# EAGLE board LinuxBoard_v1.3 (EAGLE 7.2.0)
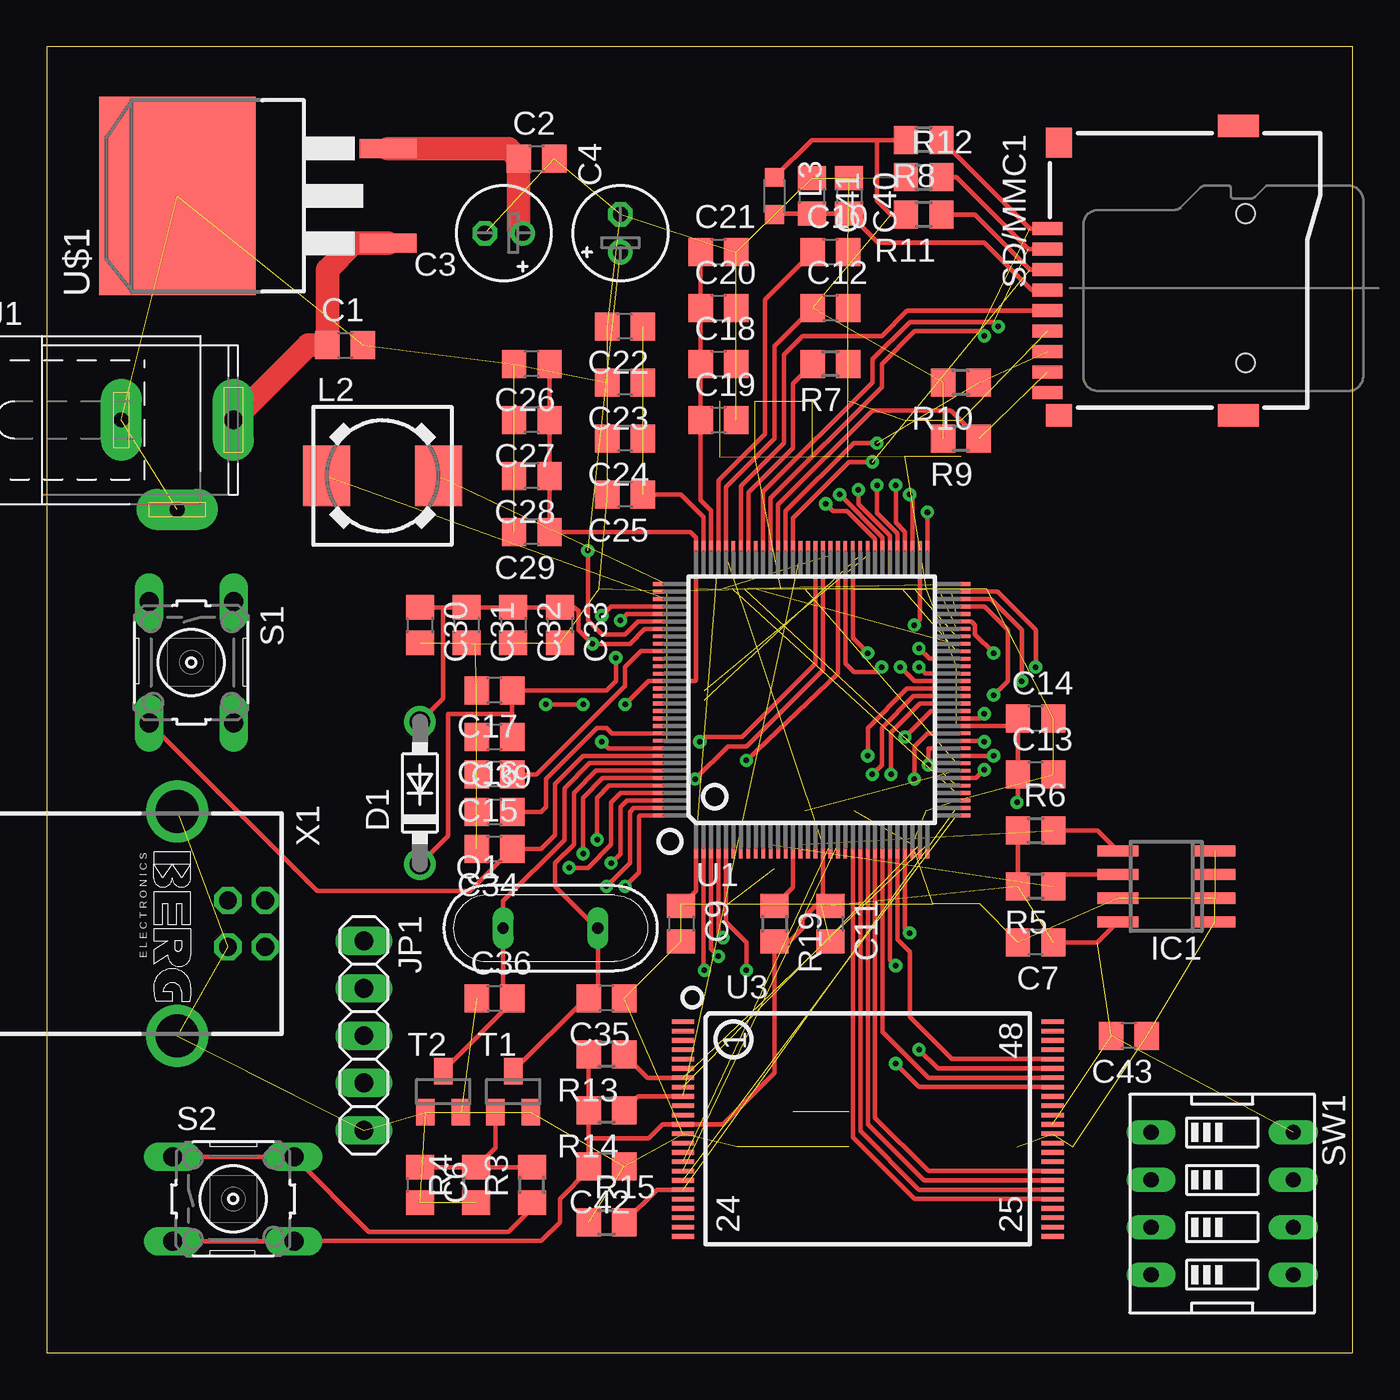
[diagram p0: board, top side]
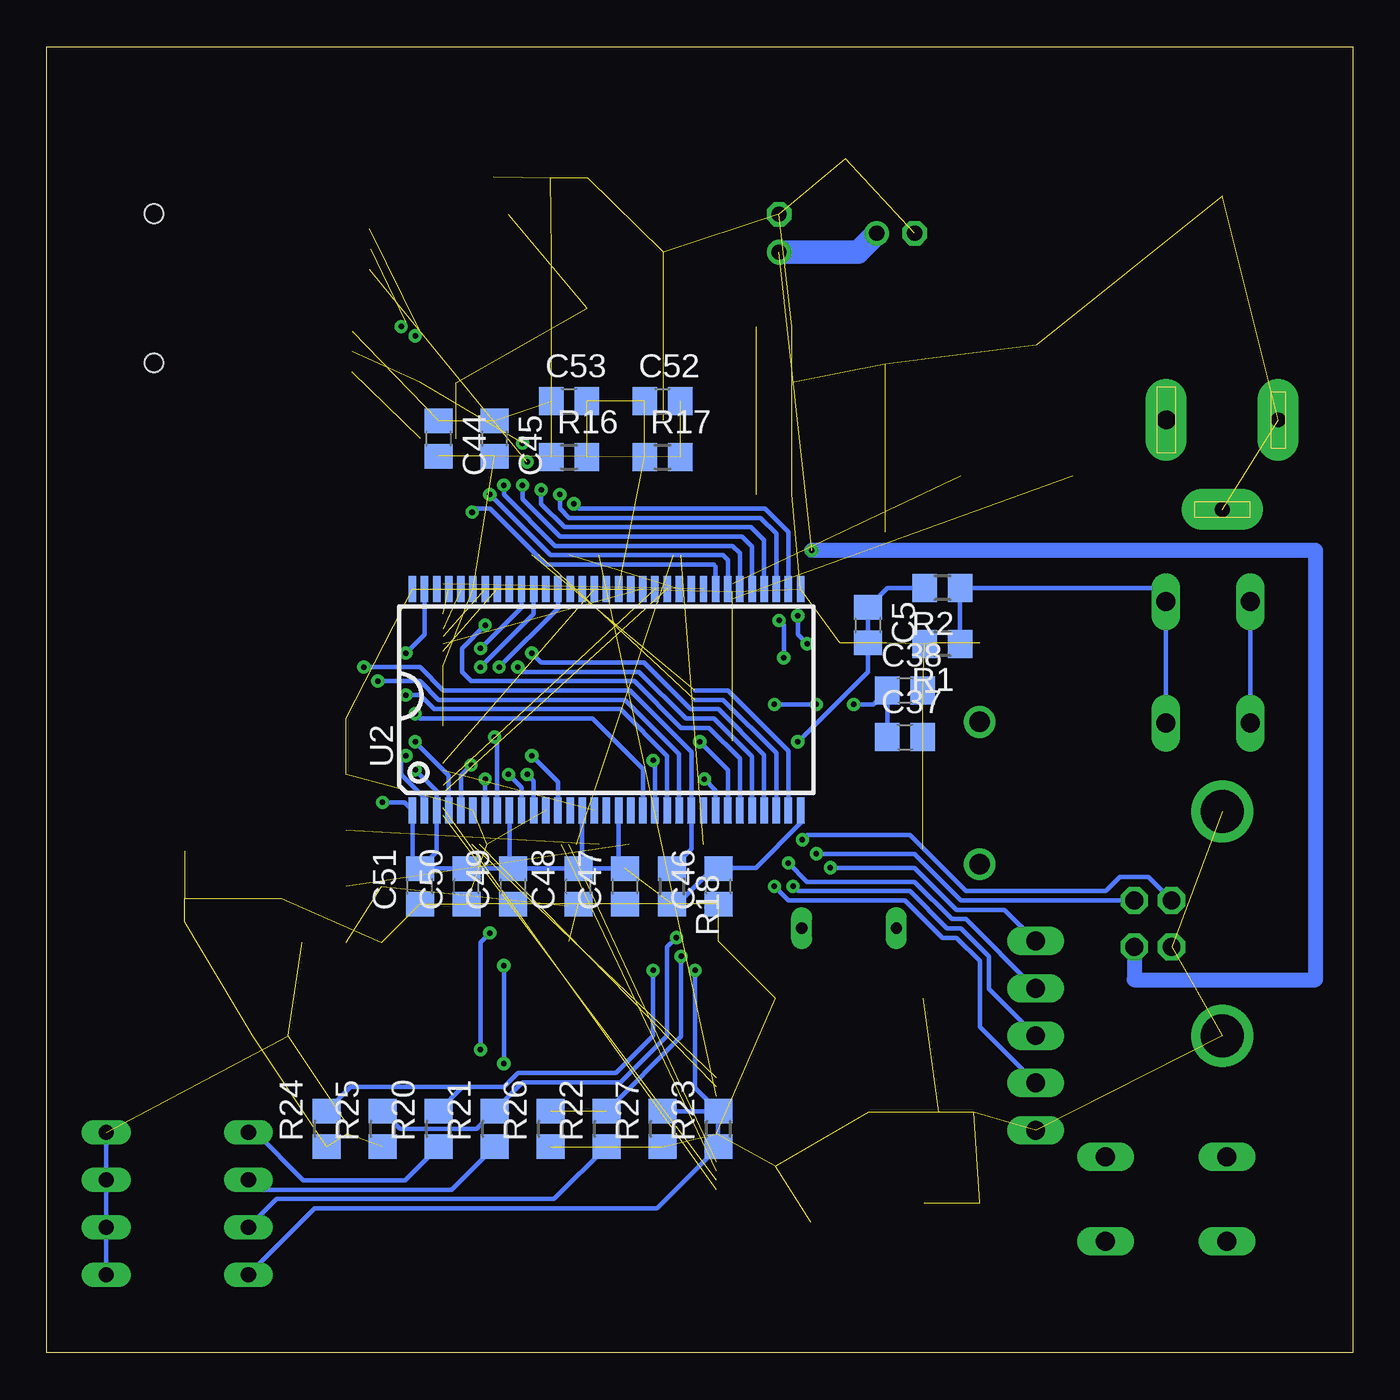
[diagram p1: board, bottom side, seen from below]

Size 70 x 70 mm. Coordinates in mm from the lower left corner, seen from the top.
Outline: 0,0 70,0 70,70 0,70 0,0
Copper layers (1*16): Top 0.035mm / dielectric 1.5mm / Bottom 0.035mm
Design rules "default": minimum track width 10mil, minimum drill 24mil, track to track 8mil, track to pad 8mil, pad to pad 8mil, via to via 8mil, smd to smd 8mil, copper to edge 40mil, drill to drill 8mil, minimum pad ring 10mil, minimum via ring 8mil, stop-mask expansion 4mil, vias tented up to drill 0mil, thermal gap 10mil
Net classes: 1 pwr: width 0.5 mm, clearance 0.2 mm

## Footprints (pad centres in the part's own frame; a part is rotated, then mirrored left to right if it is on the bottom)
C0805 = smd 1.3 x 1.5: 1 -0.95,0; 2 0.95,0
E2-5 = drill 0.813 pad 1.27: + -1.016,0 | drill 0.813 pad 1.27 octagon: - 1.016,0
DO41-7.6 = drill 1.1 pad 1.7: A 3.81,0; C -3.81,0
SO-08 = smd 0.6 x 2.2: 1 -1.905,-2.6; 2 -0.635,-2.6; 3 0.635,-2.6; 4 1.905,-2.6; 5 1.905,2.6; 6 0.635,2.6; 7 -0.635,2.6; 8 -1.905,2.6
SPC4077 = drill 0.8 pad 2.184 long: 1 -3,0; 2 0,-4.8 | drill 1 pad 2.184 long: 3 3,0
1X05 = drill 1.016 long: 1 -5.08,0; 2 -2.54,0; 3 0,0; 4 2.54,0; 5 5.08,0
DR73 = smd 2.5 x 3.25: 1 -3,0; 2 3,0
L2012C = smd 1 x 1: 1 -1,0; 2 1,0
QS = drill 0.61 long: 1 -2.54,0; 2 2.54,0
R0805 = smd 1.3 x 1.5: 1 -0.95,0; 2 0.95,0
B3F-10XX = drill 1.016 long: 1 -3.251,2.261; 2 3.251,2.261; 3 -3.251,-2.261; 4 3.251,-2.261
TFC-WPAPR-08 = smd 1.6 x 0.7: 1 -7.375,2.25; 2 -7.375,1.15; 3 -7.375,0.05; 4 -7.375,-1.05; 5 -7.375,-2.15; 6 -7.375,-3.25; 7 -7.375,-4.35; 8 -7.375,-5.45; 9 -7.375,-6.55 | smd 1.4 x 1.2: 10 -6.75,-7.75 | smd 1.4 x 1.6: 11 -6.75,6.85 | smd 2.2 x 1.2: 12 2.85,-7.75; 13 2.85,7.75 | hole 1: 3.25,-4.95; 3.25,3.05
EDG-04 = drill 0.813 long: 1 -3.81,-3.81; 2 -1.27,-3.81; 3 1.27,-3.81; 4 3.81,-3.81; 5 3.81,3.81; 6 1.27,3.81; 7 -1.27,3.81; 8 -3.81,3.81
SOT23 = smd 1 x 1.4: 1 -0.95,-1.1; 2 0.95,-1.1; 3 0,1.1
TQFP128LD = smd 0.2 x 1.5: 1 -6.2,-7.75; 2 -5.8,-7.75; 3 -5.4,-7.75; 4 -5,-7.75; 5 -4.6,-7.75; 6 -4.2,-7.75; 7 -3.8,-7.75; 8 -3.4,-7.75; 9 -3,-7.75; 10 -2.6,-7.75; 11 -2.2,-7.75; 12 -1.8,-7.75; 13 -1.4,-7.75; 14 -1,-7.75; 15 -0.6,-7.75; 16 -0.2,-7.75; 17 0.2,-7.75; 18 0.6,-7.75; 19 1,-7.75; 20 1.4,-7.75; 21 1.8,-7.75; 22 2.2,-7.75; 23 2.6,-7.75; 24 3,-7.75; 25 3.4,-7.75; 26 3.8,-7.75; 27 4.2,-7.75; 28 4.6,-7.75; 29 5,-7.75; 30 5.4,-7.75; 31 5.8,-7.75; 32 6.2,-7.75; 65 6.2,7.75; 66 5.8,7.75; 67 5.4,7.75; 68 5,7.75; 69 4.6,7.75; 70 4.2,7.75; 71 3.8,7.75; 72 3.4,7.75; 73 3,7.75; 74 2.6,7.75; 75 2.2,7.75; 76 1.8,7.75; 77 1.4,7.75; 78 1,7.75; 79 0.6,7.75; 80 0.2,7.75; 81 -0.2,7.75; 82 -0.6,7.75; 83 -1,7.75; 84 -1.4,7.75; 85 -1.8,7.75; 86 -2.2,7.75; 87 -2.6,7.75; 88 -3,7.75; 89 -3.4,7.75; 90 -3.8,7.75; 91 -4.2,7.75; 92 -4.6,7.75; 93 -5,7.75; 94 -5.4,7.75; 95 -5.8,7.75; 96 -6.2,7.75 | smd 1.5 x 0.2: 33 7.75,-6.2; 34 7.75,-5.8; 35 7.75,-5.4; 36 7.75,-5; 37 7.75,-4.6; 38 7.75,-4.2; 39 7.75,-3.8; 40 7.75,-3.4; 41 7.75,-3; 42 7.75,-2.6; 43 7.75,-2.2; 44 7.75,-1.8; 45 7.75,-1.4; 46 7.75,-1; 47 7.75,-0.6; 48 7.75,-0.2; 49 7.75,0.2; 50 7.75,0.6; 51 7.75,1; 52 7.75,1.4; 53 7.75,1.8; 54 7.75,2.2; 55 7.75,2.6; 56 7.75,3; 57 7.75,3.4; 58 7.75,3.8; 59 7.75,4.2; 60 7.75,4.6; 61 7.75,5; 62 7.75,5.4; 63 7.75,5.8; 64 7.75,6.2; 97 -7.75,6.2; 98 -7.75,5.8; 99 -7.75,5.4; 100 -7.75,5; 101 -7.75,4.6; 102 -7.75,4.2; 103 -7.75,3.8; 104 -7.75,3.4; 105 -7.75,3; 106 -7.75,2.6; 107 -7.75,2.2; 108 -7.75,1.8; 109 -7.75,1.4; 110 -7.75,1; 111 -7.75,0.6; 112 -7.75,0.2; 113 -7.75,-0.2; 114 -7.75,-0.6; 115 -7.75,-1; 116 -7.75,-1.4; 117 -7.75,-1.8; 118 -7.75,-2.2; 119 -7.75,-2.6; 120 -7.75,-3; 121 -7.75,-3.4; 122 -7.75,-3.8; 123 -7.75,-4.2; 124 -7.75,-4.6; 125 -7.75,-5; 126 -7.75,-5.4; 127 -7.75,-5.8; 128 -7.75,-6.2
66TSOP-II = smd 0.4 x 1.4: 1 -10.4,-5.925; 2 -9.75,-5.925; 3 -9.1,-5.925; 4 -8.45,-5.925; 5 -7.8,-5.925; 6 -7.15,-5.925; 7 -6.5,-5.925; 8 -5.85,-5.925; 9 -5.2,-5.925; 10 -4.55,-5.925; 11 -3.9,-5.925; 12 -3.25,-5.925; 13 -2.6,-5.925; 14 -1.95,-5.925; 15 -1.3,-5.925; 16 -0.65,-5.925; 17 0,-5.925; 18 0.65,-5.925; 19 1.3,-5.925; 20 1.95,-5.925; 21 2.6,-5.925; 22 3.25,-5.925; 23 3.9,-5.925; 24 4.55,-5.925; 25 5.2,-5.925; 26 5.85,-5.925; 27 6.5,-5.925; 28 7.15,-5.925; 29 7.8,-5.925; 30 8.45,-5.925; 31 9.1,-5.925; 32 9.75,-5.925; 33 10.4,-5.925; 34 10.4,5.925; 35 9.75,5.925; 36 9.1,5.925; 37 8.45,5.925; 38 7.8,5.925; 39 7.15,5.925; 40 6.5,5.925; 41 5.85,5.925; 42 5.2,5.925; 43 4.55,5.925; 44 3.9,5.925; 45 3.25,5.925; 46 2.6,5.925; 47 1.95,5.925; 48 1.3,5.925; 49 0.65,5.925; 50 0,5.925; 51 -0.65,5.925; 52 -1.3,5.925; 53 -1.95,5.925; 54 -2.6,5.925; 55 -3.25,5.925; 56 -3.9,5.925; 57 -4.55,5.925; 58 -5.2,5.925; 59 -5.85,5.925; 60 -6.5,5.925; 61 -7.15,5.925; 62 -7.8,5.925; 63 -8.45,5.925; 64 -9.1,5.925; 65 -9.75,5.925; 66 -10.4,5.925
TSOP48 = smd 1.2 x 0.25: 1 -9.9,5.75; 2 -9.9,5.25; 3 -9.9,4.75; 4 -9.9,4.25; 5 -9.9,3.75; 6 -9.9,3.25; 7 -9.9,2.75; 8 -9.9,2.25; 9 -9.9,1.75; 10 -9.9,1.25; 11 -9.9,0.75; 12 -9.9,0.25; 13 -9.9,-0.25; 14 -9.9,-0.75; 15 -9.9,-1.25; 16 -9.9,-1.75; 17 -9.9,-2.25; 18 -9.9,-2.75; 19 -9.9,-3.25; 20 -9.9,-3.75; 21 -9.9,-4.25; 22 -9.9,-4.75; 23 -9.9,-5.25; 24 -9.9,-5.75; 25 9.9,-5.75; 26 9.9,-5.25; 27 9.9,-4.75; 28 9.9,-4.25; 29 9.9,-3.75; 30 9.9,-3.25; 31 9.9,-2.75; 32 9.9,-2.25; 33 9.9,-1.75; 34 9.9,-1.25; 35 9.9,-0.75; 36 9.9,-0.25; 37 9.9,0.25; 38 9.9,0.75; 39 9.9,1.25; 40 9.9,1.75; 41 9.9,2.25; 42 9.9,2.75; 43 9.9,3.25; 44 9.9,3.75; 45 9.9,4.25; 46 9.9,4.75; 47 9.9,5.25; 48 9.9,5.75
D2PAK-3 = smd 1.016 x 3.05: 1 -2.54,-11.31; 3 2.54,-11.31 | smd 10.66 x 8.38: 4 0,0
PN61729-S = drill 0.95 octagon: 1 1.25,4.71; 2 -1.25,4.71; 3 -1.25,2.71; 4 1.25,2.71 | drill 2.3 pad 2.9: S1 -6.02,0; S2 6.02,0

## Placement (x,y rotation side)
C1  0.33uF  [C0805]  16,54 0 top
C2  0.1uF  [C0805]  26.25,64 0 top
C3  4.7uF  [E2-5]  24.5,60 180 top
C4  220uF  [E2-5]  30.75,60 90 top
C5  0.1uF  [C0805]  26,39 270 bottom
C6  0.1uF  [C0805]  20,9 270 top
C7  0.1uF  [C0805]  53,22 180 top
C9  0.1uF  [C0805]  34,23 270 top
C10  0.1uF  [C0805]  42,59 0 top
C11  0.1uF  [C0805]  42,23 270 top
C12  0.1uF  [C0805]  42,56 0 top
C13  0.1uF  [C0805]  53,31 0 top
C14  0.1uF  [C0805]  53,34 0 top
C15  1uF  [C0805]  24,31 180 top
C16  1uF  [C0805]  24,33 180 top
C17  0.1uF  [C0805]  24,35.5 180 top
C18  0.01uF  [C0805]  36,53 0 top
C19  0.1uF  [C0805]  36,50 0 top
C20  1uF  [C0805]  36,56 0 top
C21  33uF  [C0805]  36,59 0 top
C22  0.01uF  [C0805]  31,55 180 top
C23  0.1uF  [C0805]  31,52 180 top
C24  1uF  [C0805]  31,49 180 top
C25  33uF  [C0805]  31,46 180 top
C26  0.01uF  [C0805]  26,53 180 top
C27  0.1uF  [C0805]  26,50 180 top
C28  1uF  [C0805]  26,47 180 top
C29  33uF  [C0805]  26,44 180 top
C30  0.01uF  [C0805]  20,39 270 top
C31  0.1uF  [C0805]  22.5,39 270 top
C32  1uF  [C0805]  25,39 270 top
C33  33uF  [C0805]  27.5,39 270 top
C34  0.1uF  [C0805]  24,27 180 top
C35  10pF  [C0805]  30,19 180 top
C36  10pF  [C0805]  24,19 0 top
C37  0.1uF  [C0805]  24,33 0 bottom
C38  1uF  [C0805]  24,35.5 0 bottom
C39  1uF  [C0805]  24,29 0 top
C40  22uF  [C0805]  43,62 270 top
C41  22uF  [C0805]  41,62 270 top
C42  0.1uF  [C0805]  30,10 180 top
C43  22uF  [C0805]  58,17 180 top
C44  0.1uF  [C0805]  49,49 270 bottom
C45  0.1uF  [C0805]  46,49 270 bottom
C46  0.1uF  [C0805]  34,25 90 bottom
C47  0.1uF  [C0805]  39,25 90 bottom
C48  0.1uF  [C0805]  41.5,25 90 bottom
C49  0.1uF  [C0805]  45,25 90 bottom
C50  0.1uF  [C0805]  47.5,25 90 bottom
C51  0.1uF  [C0805]  50,25 90 bottom
C52  0.1uF  [C0805]  37,51 0 bottom
C53  0.1uF  [C0805]  42,51 0 bottom
D1  1N5819-B  [DO41-7.6]  20,30 90 top
IC1  24LC512-I/SM  [SO-08]  60,25 90 top
J1  [SPC4077]  7,50 0 top
JP1  UART  [1X05]  17,17 270 top
L2  DE0703-15  [DR73]  18,47 0 top
L3  CW0805-470  [L2012C]  39,62 270 top
Q1  XTAL-24M  [QS]  27,22.75 0 top
R1  100k  [R0805]  22,38 180 bottom
R2  1k  [R0805]  22,41 180 bottom
R3  1k  [R0805]  26,9 90 top
R4  1k  [R0805]  23,9 90 top
R5  2.2k  [R0805]  53,25 180 top
R6  2.2k  [R0805]  53,28 0 top
R7  100k  [R0805]  42,53 180 top
R8  100k  [R0805]  47,65 180 top
R9  100k  [R0805]  49,49 180 top
R10  100k  [R0805]  49,52 180 top
R11  10k  [R0805]  47,61 180 top
R12  1M  [R0805]  47,63 0 top
R13  47k  [R0805]  30,16 180 top
R14  47k  [R0805]  30,13 180 top
R15  47k  [R0805]  30,7 0 top
R16  47k  [R0805]  42,48 0 bottom
R17  47k  [R0805]  37,48 0 bottom
R18  10k  [R0805]  36.5,25 270 bottom
R19  47k  [R0805]  39,23 270 top
R20  4.7k  [R0805]  49,12 90 bottom
R21  4.7k  [R0805]  46,12 90 bottom
R22  4.7k  [R0805]  40,12 90 bottom
R23  4.7k  [R0805]  34,12 90 bottom
R24  47k  [R0805]  55,12 90 bottom
R25  47k  [R0805]  52,12 90 bottom
R26  47k  [R0805]  43,12 90 bottom
R27  47k  [R0805]  37,12 90 bottom
S1  POWER  [B3F-10XX]  7.75,37 270 top
S2  RESET  [B3F-10XX]  10,8.25 0 top
SD/MMC1  MICRO_SD/MMC_CP_NEWTFC-WPAPR-08  [TFC-WPAPR-08]  61,58 0 top
SW1  [EDG-04]  63,8 270 top
T1  BC846  [SOT23]  25,14 0 top
T2  BC846  [SOT23]  21.25,14 0 top
U1  MCIMX233DAG4B_LD  [TQFP128LD]  41,35 0 top
U2  H5DU5162ETR-E3C  [66TSOP-II]  40,35 0 bottom
U3  EN27LN4G08  [TSOP48]  44,12 0 top
U$1  L7805CD2T  [D2PAK-3]  7,62 90 top
X1  PN61729-S  [PN61729-S]  7,23 270 top

## Library data of the parts
C1-C7 C9-C53 L3 R1-R27 = rcl
D1 = diode
IC1 = microchip; MF: MICROCHIP; MPN: 24LC128-I/SNG; OC_FARNELL: 9757937; OC_NEWARK: 30H1511
J1 = con-jack; OC_FARNELL: unknown; OC_NEWARK: unknown
JP1 = pinhead
L2 = inductors
Q1 SW1 = special
S1 S2 = switch-omron; MPN: B3F-1000; OC_FARNELL: 176432; OC_NEWARK: 36M3542
SD/MMC1 U3 = A13-OLinuXino_WIFI_Rev_G
T1 T2 = transistor
U1 U$1 = hosho
U2 = iMX233-OLinuXino-Micro_Rev_D
X1 = con-berg; OC_FARNELL: unknown; OC_NEWARK: unknown

## Nets
1V2: C9.1 C10.1 U1.1 U1.93
3V3: C7.1 C11.1 C12.1 C42.2 C43.2 IC1.8 L3.1 R5.2 R6.1 R8.2 R9.2 R10.2 R11.2 R13.2 R14.2 R19.2 S2.3 S2.4 SW1.5 SW1.6 SW1.7 SW1.8 U1.18 U1.92 U3.12 U3.37
5V0: C2.1 C3.+ C4.+ U1.102 U$1.3 X1.1
AUART1_RX: JP1.4 U1.128
AUART1_TX: JP1.3 U1.127
DCDC_BATTERY: C30.1 C31.1 C32.1 C33.1 D1.A U1.100 U1.103
DCDC_VDDA: C26.1 C27.1 C28.1 C29.1 C37.1 C38.1 U1.96 U1.110
DCDC_VDDD: C18.1 C19.1 C20.1 C21.1 U1.94
DCDC_VDDIO: C22.1 C23.1 C24.1 C25.1 U1.95
DEBUG: R7.2 U1.89
DUART_RX: JP1.1 U1.125
DUART_TX: JP1.2 U1.126
EMI_A00: U1.76 U2.29
EMI_A01: U1.75 U2.30
EMI_A02: U1.74 U2.31
EMI_A03: U1.73 U2.32
EMI_A04: U1.72 U2.35
EMI_A05: U1.71 U2.36
EMI_A06: U1.70 U2.37
EMI_A07: U1.69 U2.38
EMI_A08: U1.68 U2.39
EMI_A09: U1.67 U2.40
EMI_A10: U1.66 U2.28
EMI_A11: U1.65 U2.41
EMI_A12: U1.64 U2.42
EMI_BA0: U1.79 U2.26
EMI_BA1: U1.80 U2.27
EMI_CASN: U1.61 U2.22
EMI_CE0N: R18.1 U1.63 U2.24
EMI_CKE: U1.78 U2.44
EMI_CLK: U1.36 U2.45
EMI_CLKN: U1.37 U2.46
EMI_D00: U1.41 U2.2
EMI_D01: U1.43 U2.4
EMI_D02: U1.42 U2.5
EMI_D03: U1.44 U2.7
EMI_D04: U1.47 U2.8
EMI_D05: U1.48 U2.10
EMI_D06: U1.49 U2.11
EMI_D07: U1.50 U2.13
EMI_D08: U1.51 U2.54
EMI_D09: U1.52 U2.56
EMI_D10: U1.54 U2.57
EMI_D11: U1.55 U2.59
EMI_D12: U1.57 U2.60
EMI_D13: U1.58 U2.62
EMI_D14: U1.60 U2.63
EMI_D15: U1.59 U2.65
EMI_DQM0: U1.46 U2.20
EMI_DQM1: U1.56 U2.47
EMI_DQS0: U1.39 U2.16
EMI_DQS1: U1.40 U2.51
EMI_RASN: U1.62 U2.23
EMI_WEN: U1.77 U2.21
GND: C1.2 C2.2 C3.- C4.- C5.2 C6.2 C7.2 C9.2 C10.2 C11.2 C12.2 C13.2 C14.2 C15.2 C16.2 C17.2 C18.2 C19.2 C20.2 C21.2 C22.2 C23.2 C24.2 C25.2 C26.2 C27.2 C28.2 C29.2 C30.2 C31.2 C32.2 C33.2 C34.2 C35.1 C36.1 C37.2 C38.2 C39.1 C40.1 C41.1 C42.1 C43.1 C44.1 C45.1 C46.1 C47.1 C48.1 C49.1 C50.1 C51.1 C53.1 IC1.1 IC1.2 IC1.3 IC1.4 IC1.7 J1.1 J1.2 JP1.5 R1.2 R4.1 R7.1 R12.1 R15.1 R16.1 R24.1 R25.1 R26.1 R27.1 SD/MMC1.6 T1.2 T2.1 T2.2 U1.30 U1.35 U1.98 U1.105 U1.112 U1.118 U2.6 U2.12 U2.34 U2.48 U2.52 U2.58 U2.64 U2.66 U3.13 U3.36 U$1.4 X1.4 X1.S1 X1.S2
GPMI_ALE: U1.20 U3.17
GPMI_CE0N: R14.1 U1.82 U3.9
GPMI_CLE: U1.19 U3.16
GPMI_D00: U1.22 U3.29
GPMI_D01: U1.23 U3.30
GPMI_D02: U1.24 U3.31
GPMI_D03: U1.25 U3.32
GPMI_D04: U1.27 U3.41
GPMI_D05: U1.26 U3.42
GPMI_D06: U1.29 U3.43
GPMI_D07: U1.28 U3.44
GPMI_RDN: U1.31 U3.8
GPMI_RDY0: R13.1 U1.32 U3.7
GPMI_WPN: R15.2 U1.34 U3.19
GPMI_WRN: U1.33 U3.18
HP_VGND: U1.111
I2C_SCL: IC1.6 R5.1 U1.11
I2C_SDA: IC1.5 R6.2 U1.15
LCD_D00: R23.2 R27.2 U1.2
LCD_D01: R22.2 R26.2 U1.3
LCD_D02: R21.2 R25.2 U1.4
LCD_D03: R20.2 R24.2 U1.5
N$1: C1.1 J1.3 U$1.1
N$2: R3.1 S2.1 S2.2
N$3: R1.1 R2.1 S1.1 S1.2
N$4: C6.1 R3.2 R4.2 T1.1
N$5: R20.1 SW1.1
N$6: R21.1 SW1.2
N$7: R22.1 SW1.3
N$8: R23.1 SW1.4
N$9: L2.2 U1.97
N$11: L2.1 U1.99
N$12: C39.2 U1.117
N$13: R19.1 U1.14
N$16: C40.2 C41.2 L3.2 SD/MMC1.4
N$26: C52.1 C53.2 R16.2 R17.1 U2.49
PSWITCH: C5.1 R2.2 U1.119
SSP1_CMD: R11.1 SD/MMC1.3 U1.83
SSP1_DATA0: R10.1 SD/MMC1.7 U1.84
SSP1_DATA1: R9.1 SD/MMC1.8 U1.85
SSP1_DATA2: R8.1 SD/MMC1.1 U1.86
SSP1_DATA3: R12.2 SD/MMC1.2 U1.87
SSP1_SCK: SD/MMC1.5 U1.90
USB_DM: U1.123 X1.2
USB_DP: U1.124 X1.3
VDD4P2: C16.1 C17.1 D1.C U1.101
VDDIO_DRAM: C13.1 C14.1 C44.2 C45.2 C46.2 C47.2 C48.2 C49.2 C50.2 C51.2 C52.2 R17.2 R18.2 U1.38 U1.45 U1.53 U2.1 U2.3 U2.9 U2.15 U2.18 U2.33 U2.55 U2.61
VDDM/LRADC4: C15.1 U1.106
VDDXTAL: C34.1 S1.3 S1.4 U1.120
XTALI: C35.2 Q1.2 T1.3 U1.122
XTALO: C36.2 Q1.1 T2.3 U1.121

## Tracks (layer width: path | path; a pad name or v marks a point on that pad's centre or on a via)
1V2  (1 unrouted)
  Top 0.254: U1.93 36,46.75 38.5,49.25 38.5,56.45 C10.1 | U1.1 34.8,24.75 C9.1
3V3  (9 unrouted)
  Top 0.254: 29.05,11.5 R14.2 R13.2 | 29.05,11.5 C42.2 29.05,9.8 27.5,8.25 27.5,7 26.5,6 13.26,6 S2.4 S2.3 | 29.05,11.5 32.25,11.5 33,12.25 U3.12 36.25,12.25 39,15 R19.2 39.8,22.05 40.5,22.75 40.5,23.25 41.6,24.35 | C11.1 41.6,24.35 | 41.6,24.35 U1.18 | U1.92 36.4,46.4 39,49 39,53.95 C12.1 | R6.1 R5.2 | IC1.8 56.3,22 C7.1 | R8.2 44.5,65 | 44.5,65 41,65 L3.1 | R11.2 45.25,61 44.5,61.75 44.5,65
  Bottom 0.254: SW1.5 SW1.6 SW1.7 SW1.8
5V0  (via drill 0.3)  (1 unrouted)
  Top 0.254: U1.102 31.7,39.2 31,38.5 29.75,38.5 29,39.25 v29,43
  Top 1.27: C3.+ 25.3,60.22 C2.1 24.76,64.54 U$1.3
  Bottom 0.813: X1.1 11.71,20 2,20 2,43 v29,43
  Bottom 1.27: C4.+ 26.53,58.98 C3.+
AUART1_RX  (via drill 0.3)
  Top 0.254: v31,25 31.75,25.75 31.75,28.75 31.8,28.8 U1.128
  Bottom 0.254: JP1.4 20,17.46 20,21 21.25,22.25 22,22.25 24,24.25 30.25,24.25 v31,25
AUART1_TX  (via drill 0.3)
  Top 0.254: U1.127 31.45,29.2 31.25,29 31.25,26.25 v30,25
  Bottom 0.254: v30,25 29.75,24.75 23.75,24.75 21.75,22.75 21,22.75 19.5,21.25 19.5,19.5 JP1.3
DCDC_BATTERY  (via drill 0.3)
  Top 0.254: C30.1 21.25,39.95 | 21.25,39.95 C31.1 C32.1 C33.1 28.3,39.95 28.5,39.75 28.5,38.75 v29.25,38 31.25,38 32.05,38.8 U1.103 | U1.100 30.25,40 v29.75,39.5 | D1.A 21.25,35.06 21.25,39.95
  Bottom 0.254: v29.75,39.5 29.75,38.5 v29.25,38
DCDC_VDDA  (via drill 0.3)
  Top 0.254: v31,34.75 32.25,36 U1.110 34.75,36 34.8,36.05 U1.96 34.8,43.7 34.5,44 C29.1 C28.1 C27.1 C26.1 | v28.75,34.75 v26.75,34.75
  Bottom 0.254: v31,34.75 v28.75,34.75 | v26.75,34.75 25.7,34.75 C38.1 C37.1
DCDC_VDDD
  Top 0.254: U1.94 35.6,45.15 35.05,45.7 C19.1 C18.1 C20.1 C21.1
DCDC_VDDIO  (3 unrouted)
  Top 0.254: C25.1 34,46 35.2,44.8 U1.95
DEBUG
  Top 0.254: U1.89 37.6,46.1 40,48.5 40,51.95 R7.2
DUART_RX  (via drill 0.3)
  Top 0.254: U1.125 30.75,30 30.25,29.5 30.25,27.25 29,26 v28,26
  Bottom 0.254: JP1.1 18.67,23.75 21.25,23.75 23.5,26 v28,26
DUART_TX  (via drill 0.3)
  Top 0.254: v30.25,26.25 30.75,26.75 30.75,29.25 31.1,29.6 U1.126
  Bottom 0.254: JP1.2 17.04,19.54 20.75,23.25 21.5,23.25 23.5,25.25 29.25,25.25 v30.25,26.25
EMI_A00  (via drill 0.3)
  Top 0.254: U1.76 42.8,36.95 43.25,36.5 44.5,36.5 v44.75,36.75
  Bottom 0.254: U2.29 32.2,31.95 34.25,34 35.75,34 38.25,36.5 44.5,36.5 v44.75,36.75
EMI_A01  (via drill 0.3)
  Top 0.254: v44,37.5 43.2,38.3 U1.75
  Bottom 0.254: U2.30 31.55,32.05 34,34.5 35.5,34.5 38,37 43.5,37 v44,37.5
EMI_A02  (1 unrouted)
  Bottom 0.254: U2.31 30.9,32.15 33.75,35 35.25,35
EMI_A03  (1 unrouted)
  Bottom 0.254: U2.32 30.25,32.25 33.5,35.5 35.25,35.5
EMI_A04  (via drill 0.3)
  Top 0.254: U1.72 44.4,43.6 42.88,45.12 42.12,45.12 v41.75,45.5
  Bottom 0.254: U2.35 30.25,44 31.5,45.25 41.5,45.25 v41.75,45.5
EMI_A05  (via drill 0.3)
  Top 0.254: v42.5,46 44.8,43.7 U1.71
  Bottom 0.254: U2.36 30.9,43.9 31.75,44.75 42,44.75 42.5,45.25 v42.5,46
EMI_A06  (via drill 0.3)
  Top 0.254: v43.5,46.25 43.5,45.5 45.2,43.8 U1.70
  Bottom 0.254: U2.37 31.55,43.55 32.25,44.25 42.25,44.25 43.5,45.5 v43.5,46.25
EMI_A07  (via drill 0.3)
  Top 0.254: U1.69 45.6,43.9 44.5,45 v44.5,46.5
  Bottom 0.254: U2.38 32.2,43.2 32.75,43.75 42.5,43.75 44.5,45.75 v44.5,46.5
EMI_A08  (via drill 0.3)
  Top 0.254: U1.68 46,44 45.5,44.5 v45.5,46.5
  Bottom 0.254: U2.39 32.85,42.85 33.25,43.25 42.75,43.25 45.5,46 v45.5,46.5
EMI_A09  (via drill 0.3)
  Top 0.254: U1.67 46.4,44 46.4,44.1 46.4,45.85 v46.25,46
  Bottom 0.254: U2.40 33.5,42.5 33.75,42.75 43,42.75 v46.25,46
EMI_A10  (via drill 0.3)
  Top 0.254: v46.5,39 46.8,39.3 U1.66
  Bottom 0.254: U2.28 32.85,31.85 34.5,33.5 36,33.5 38.5,36 47.25,36 47.75,36.5 47.75,37.75 v46.5,39
EMI_A11  (via drill 0.3)
  Top 0.254: U1.65 v47.2,45.05
  Bottom 0.254: U2.41 34.15,42.15 34.25,42.25 43.25,42.25 46.25,45.25 47,45.25 v47.2,45.05
EMI_A12  (1 unrouted)
EMI_BA0  (via drill 0.3)
  Top 0.254: v34.75,30.75 36.5,32.5 37.5,32.5 41.6,36.6 U1.79
  Bottom 0.254: U2.26 34.15,30.15 v34.75,30.75
EMI_BA1  (via drill 0.3)
  Top 0.254: v35,32.75 35.25,33 37.25,33 41.2,36.95 U1.80
  Bottom 0.254: U2.27 33.5,31.25 v35,32.75
EMI_CASN  (via drill 0.3)
  Top 0.254: U1.61 50.25,40 51.5,38.75 51.5,36 v50.75,35.25
  Bottom 0.254: U2.22 36.75,32 39.25,34.5 49.25,34.5 50,35.25 v50.75,35.25
EMI_CE0N  (via drill 0.3)
  Top 0.254: v53,36.75 53,38.75 50.95,40.8 U1.63
  Bottom 0.254: R18.1 35.45,27 U2.24 35.45,32.2 38.75,35.5 48.75,35.5 50,36.75 v53,36.75
EMI_CKE  (1 unrouted)
EMI_CLK  (1 unrouted)
EMI_CLKN  (1 unrouted)
EMI_D00  (via drill 0.3)
  Top 0.254: v50.75,32 U1.41
  Bottom 0.254: U2.2 49.75,29.75 51,31 51,32 v50.75,32
EMI_D01  (via drill 0.3)
  Top 0.254: v50.25,32.75 50.2,32.8 U1.43
  Bottom 0.254: U2.4 48.45,30.95 v50.25,32.75
EMI_D02  (via drill 0.3)
  Top 0.254: v47.25,31.5 47.25,32.4 U1.42
  Bottom 0.254: U2.5 47.8,30.95 v47.25,31.5
EMI_D03  (via drill 0.3)
  Top 0.254: v46.5,30.75 46.5,32.5 47.2,33.2 U1.44
  Bottom 0.254: U2.7 v46.5,30.75
EMI_D04  (via drill 0.3)
  Top 0.254: U1.47 47.4,34.4 v46,33
  Bottom 0.254: U2.8 45.85,32.85 v46,33
EMI_D05  (via drill 0.3)
  Top 0.254: v45.25,31 45.25,33.25 46.8,34.8 U1.48
  Bottom 0.254: U2.10 44.55,30.3 v45.25,31
EMI_D06  (via drill 0.3)
  Top 0.254: v44.25,31 44.75,31.5 44.75,33.5 46.45,35.2 U1.49
  Bottom 0.254: U2.11 43.9,30.65 v44.25,31
EMI_D07  (via drill 0.3)
  Top 0.254: v44,32 44,33.5 46.1,35.6 U1.50
  Bottom 0.254: U2.13 42.6,30.6 v44,32
EMI_D08  (via drill 0.3)
  Top 0.254: U1.51 46.5,36 v45.75,36.75
  Bottom 0.254: v45.75,36.75 42.6,39.9 U2.54
EMI_D09  (via drill 0.3)
  Top 0.254: U1.52 47.1,36.4 v46.75,36.75
  Bottom 0.254: v46.75,36.75 43.9,39.6 U2.56
EMI_D10  (via drill 0.3)
  Top 0.254: U1.54 47.3,37.2 v46.75,37.75
  Bottom 0.254: v46.75,37.75 44.55,39.95 U2.57
EMI_D11  (1 unrouted)
EMI_D12  (1 unrouted)
EMI_D13  (1 unrouted)
EMI_D14  (1 unrouted)
EMI_D15  (via drill 0.3)
  Top 0.254: v50.75,37.5 49.75,38.5 49.75,39 49.55,39.2 U1.59
  Bottom 0.254: U2.65 49.75,38.5 v50.75,37.5
EMI_DQM0  (via drill 0.3)
  Top 0.254: U1.46 50,34 v50.25,34.25
  Bottom 0.254: U2.20 38.05,31.3 40.75,34 50,34 v50.25,34.25
EMI_DQM1  (1 unrouted)
EMI_DQS0  (1 unrouted)
EMI_DQS1  (1 unrouted)
EMI_RASN  (via drill 0.3)
  Top 0.254: v52.25,36 52.25,38.75 50.6,40.4 U1.62
  Bottom 0.254: U2.23 36.1,32.1 39,35 49,35 50,36 v52.25,36
EMI_WEN  (via drill 0.3)
  Top 0.254: v37.5,31.75 42.4,36.4 U1.77
  Bottom 0.254: U2.21 37.4,31.6 v37.5,31.75
GND  (92 unrouted)
GPMI_ALE  (1 unrouted)
GPMI_CE0N  (1 unrouted)
  Top 0.254: U3.9 31.7,13.75 R14.1
GPMI_CLE  (1 unrouted)
GPMI_D00
  Top 0.254: U1.22 43.2,11.55 46.5,8.25 U3.29
GPMI_D01
  Top 0.254: U1.23 43.6,11.9 46.75,8.75 U3.30
GPMI_D02
  Top 0.254: U1.24 44,12.25 47,9.25 U3.31
GPMI_D03
  Top 0.254: U1.25 44.4,12.6 47.25,9.75 U3.32
GPMI_D04  (via drill 0.3)
  Top 0.254: U1.27 45.2,21.05 v45.5,20.75 | v45.5,15.5 46.75,14.25 U3.41
  Bottom 0.254: v45.5,20.75 v45.5,15.5
GPMI_D05
  Top 0.254: U1.26 44.8,17.2 47.25,14.75 U3.42
GPMI_D06  (via drill 0.3)
  Top 0.254: U1.29 46,22.75 v46.25,22.5 | v46.75,16.25 47.75,15.25 U3.43
  Bottom 0.254: v46.25,22.5 46.75,22 v46.75,16.25
GPMI_D07
  Top 0.254: U1.28 45.6,22.15 46.25,21.5 46.25,18 48.5,15.75 U3.44
GPMI_RDN  (1 unrouted)
GPMI_RDY0  (1 unrouted)
  Top 0.254: U3.7 32.2,14.75 R13.1
GPMI_WPN  (1 unrouted)
  Top 0.254: U3.19 32.7,8.75 R15.2
GPMI_WRN  (1 unrouted)
I2C_SCL  (1 unrouted)
  Top 0.254: R5.1 54.59,25.64 IC1.6
I2C_SDA  (1 unrouted)
  Top 0.254: IC1.5 56.3,28 R6.2
LCD_D00  (via drill 0.3)
  Top 0.254: U1.2 35.2,20.55 v35.25,20.5
  Bottom 0.254: 34.05,11 R23.2 | v35.25,20.5 35.25,14.2 R23.2 | R23.2 R27.2
LCD_D01  (via drill 0.3)  (1 unrouted)
  Top 0.254: U1.3 35.6,21.65 v36,21.25
  Bottom 0.254: v36,21.25 36,16.95 R22.2
LCD_D02  (via drill 0.3)
  Top 0.254: U1.4 36,22.5 v36.25,22.25
  Bottom 0.254: v36.25,22.25 36.75,21.75 36.75,17 39.25,14.5 44.5,14.5 46,13 R21.2 46.95,12 51.05,12 R25.2
LCD_D03  (via drill 0.3)
  Top 0.254: U1.5 36.4,23.1 37.5,22 v37.5,20.5
  Bottom 0.254: v37.5,20.5 37.5,17 39.5,15 44.75,15 45.5,14.25 46.75,14.25 47.7,14.25 | 47.7,14.25 R20.2 | R24.2 53.7,14.25 47.7,14.25
N$1
  Top 1.27: J1.3 14,54 C1.1 15.05,58.05 16.46,59.46 U$1.1
N$2
  Top 0.254: R3.1 26,7.75 24.75,6.5 17.26,6.5 S2.2 S2.1
N$3
  Bottom 0.254: R1.1 R2.1 10.76,41 S1.1 S1.2
N$4
  Top 0.254: T1.1 24.05,11 R4.2 | R4.2 R3.2 | R4.2 C6.1
N$5
  Bottom 0.254: SW1.1 58.81,11.81 56.25,9.25 50.8,9.25 R20.1
N$6
  Bottom 0.254: SW1.2 58.67,8.75 48.3,8.75 R21.1
N$7
  Bottom 0.254: SW1.3 57.67,8.25 42.8,8.25 R22.1
N$8
  Bottom 0.254: SW1.4 55.63,7.75 37.3,7.75 R23.1
N$9  (1 unrouted)
N$11  (1 unrouted)
N$12
  Top 0.254: U1.117 30.3,33.2 30,33.5 29.5,33.5 26.75,30.75 26.75,29.25 26.5,29 C39.2
N$13
  Top 0.254: R19.1 40,24.95 U1.14
N$16
  Top 0.254: SD/MMC1.4 52.8,56.95 50.25,59.5 44.55,59.5 C40.2 C41.2 39.05,61.05 L3.2
N$26  (4 unrouted)
PSWITCH  (via drill 0.3)
  Top 0.254: U1.119 30.1,32.4 v29.75,32.75
  Bottom 0.254: v29.75,32.75 26,36.5 C5.1 24.95,41 R2.2
SSP1_CMD  (via drill 0.3)  (1 unrouted)
  Top 0.254: SD/MMC1.3 52.7,58.05 49.75,61 R11.1 | U1.83 40,44.75 43,47.75 v44.25,47.75
SSP1_DATA0  (via drill 0.3)  (2 unrouted)
  Top 0.254: U1.84 39.6,45.1 43.25,48.75 v44.5,48.75
SSP1_DATA1  (1 unrouted)
  Top 0.254: U1.85 39.2,45.45 44.25,50.5 48.45,50.5 R9.1
SSP1_DATA2  (via drill 0.3)  (1 unrouted)
  Top 0.254: SD/MMC1.1 52.7,60.25 R8.1 | U1.86 38.8,45.8 44.75,51.75 44.75,53 46.5,54.75 50,54.75 v50.25,54.5
SSP1_DATA3  (via drill 0.3)  (1 unrouted)
  Top 0.254: SD/MMC1.2 52.6,59.15 48.75,63 R12.2 | U1.87 38.4,46.15 44.25,52 44.25,53.25 46.25,55.25 50.75,55.25 v51,55
SSP1_SCK
  Top 0.254: U1.90 37.2,46.45 39.5,48.75 39.5,53.5 40.5,54.5 44.75,54.5 46.1,55.85 SD/MMC1.5
USB_DM  (via drill 0.3)
  Top 0.254: U1.123 29.8,30.8 28.75,29.75 v28.75,26.75
  Bottom 0.254: v28.75,26.75 23.5,26.75 21,24.25 X1.2
USB_DP  (via drill 0.3)
  Top 0.254: U1.124 30.15,30.4 29.5,29.75 v29.5,27.5
  Bottom 0.254: X1.3 10.96,25.5 12.5,25.5 13.25,24.75 20.75,24.75 23.75,27.75 29.25,27.75 v29.5,27.5
VDD4P2  (via drill 0.3)
  Top 0.254: 25,35.05 C17.1 | C17.1 24.95,34.25 | 24.95,34.25 C16.1 | U1.101 31.1,39.6 v30.75,39.25 | v30.5,37.25 30.5,36 30,35.5 C17.1 | D1.C 21.5,27.69 21.5,34.25 24.95,34.25
  Bottom 0.254: v30.75,39.25 30.5,39 v30.5,37.25
VDDIO_DRAM  (via drill 0.3)  (8 unrouted)
  Top 0.254: U1.45 52.05,33.6 C14.1 C13.1 52.05,29.55 v52,29.5 | v50.25,31.25 49.8,30.8 U1.38
  Bottom 0.254: C51.2 50.4,26.35 U2.1 50.83,29.5 v52,29.5 | C51.2 49.1,26.85 U2.3 49.1,30.1 v50.25,31.25 | C48.2 C47.2 39.35,26.3 U2.18 | C48.2 C49.2 | C49.2 C50.2 C51.2 | U2.9 45.2,26.15 C49.2 | U2.15 41.3,26.15 C48.2 | U2.33 29.6,28.4 32,26 33.95,26 C46.2 34.3,25.95 36,24.25 36.3,24.25 R18.2
VDDM/LRADC4
  Top 0.254: C15.1 26.25,31 31,35.75 31,36.75 31.85,37.6 U1.106
VDDXTAL
  Top 0.254: U1.120 28.75,32 27.25,30.5 27.25,27.75 26.5,27 C34.1 22.7,24.75 14.5,24.75 5.5,33.75 S1.4
  Bottom 0.254: S1.3 S1.4
XTALI
  Top 0.254: T1.3 28.9,19 C35.2 29.54,19.49 Q1.2 29.5,22.75 27.25,25 27.25,26.25 28.25,27.25 28.25,30 29.45,31.2 U1.122
XTALO
  Top 0.254: T2.3 24.95,18.8 C36.2 24.46,19.49 Q1.1 24.46,24.21 27.75,27.5 27.75,30.25 29.1,31.6 U1.121